# Altium PCB LCD.PcbDoc
Units mil, origin at the board's own origin, x right, y up, seen from the top; angles counter-clockwise.
Board outline 1710 x 3195 mil, 2 copper layers (Top Layer, Bottom Layer); 11 components, 24 nets, 62 pads, 11 vias.
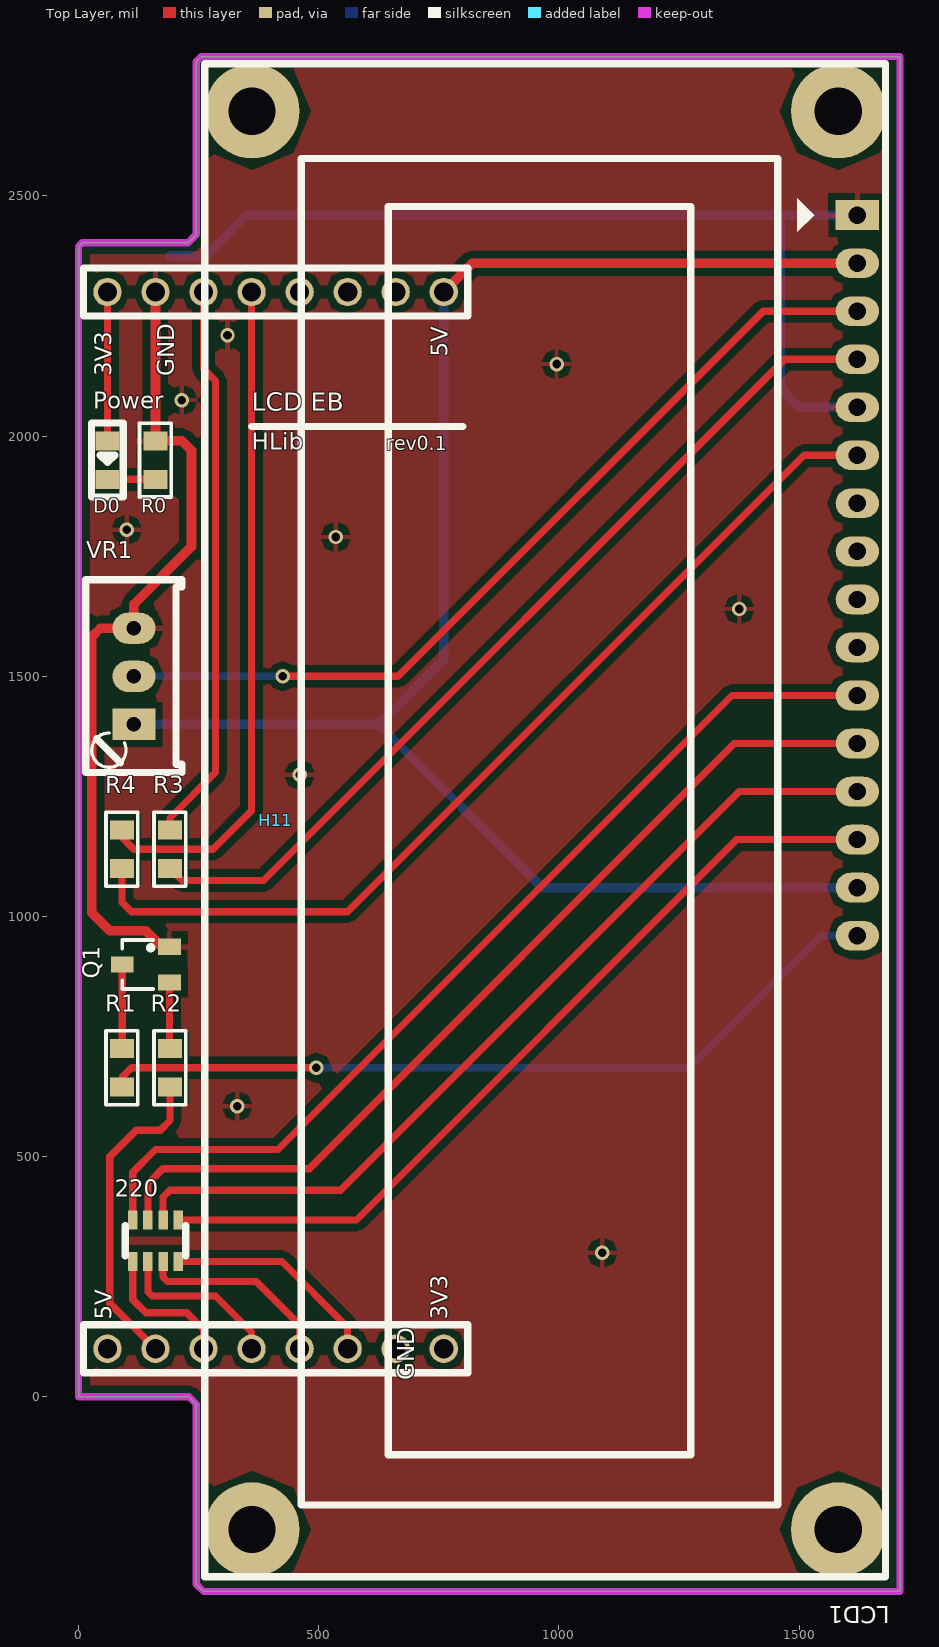
[diagram p0: Top Layer view]
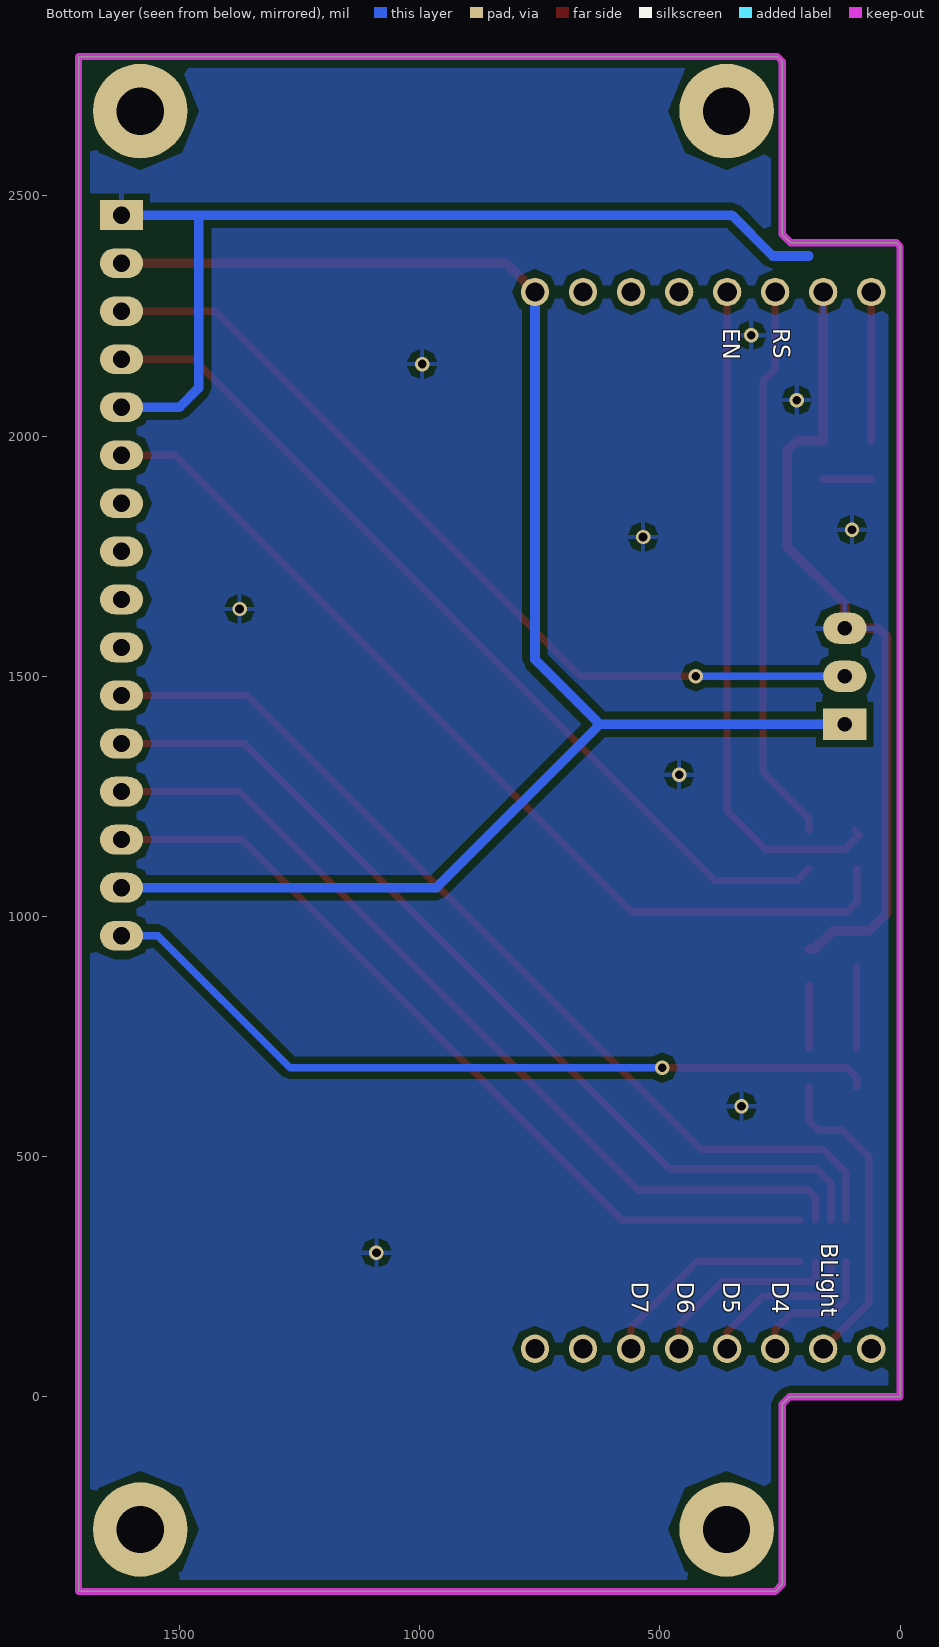
[diagram p1: Bottom Layer view, seen from below]
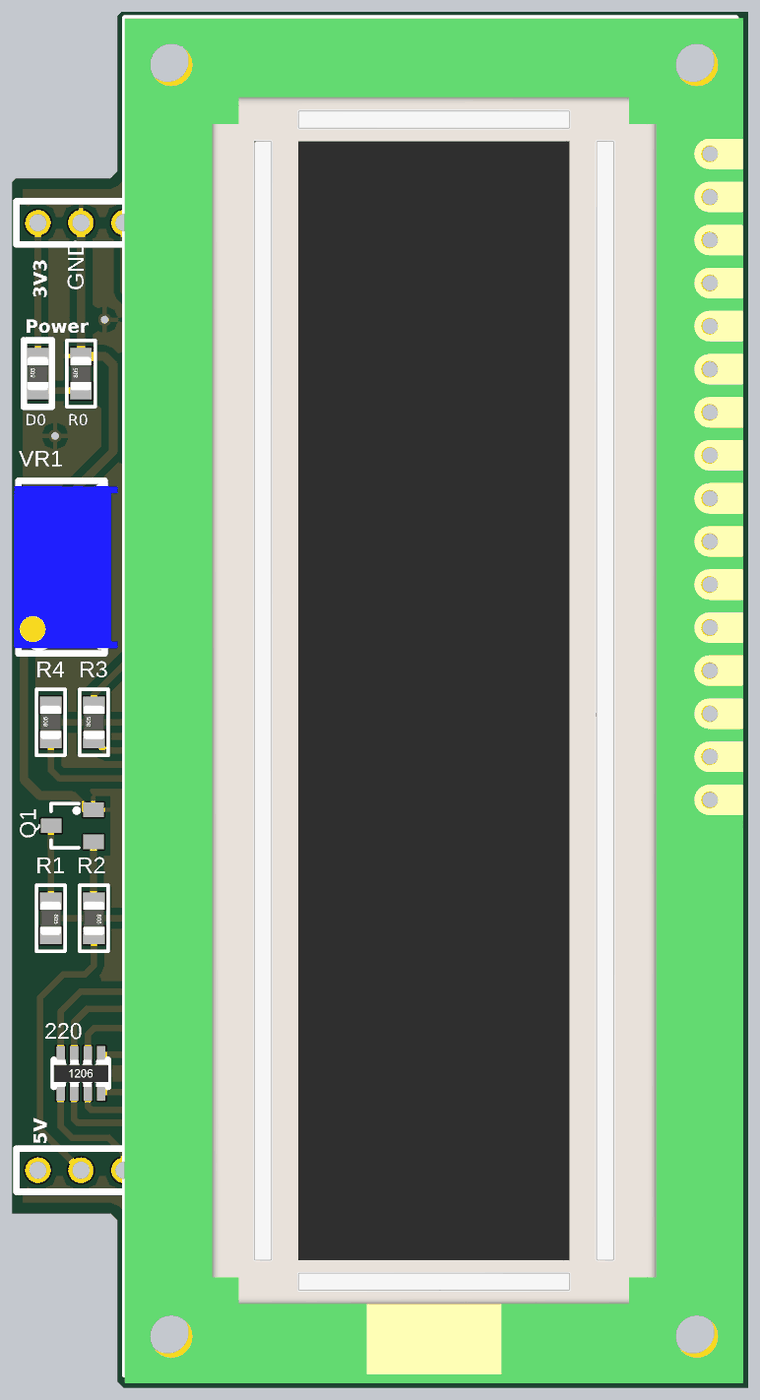
[diagram p2: 3D render of the assembled board from above, using the file's embedded part models]

## Layer stack, top to bottom
Top Layer: signal copper 1.4
Dielectric: dielectric 12.6, FR-4, Dk 4.8
Bottom Layer: signal copper 1.4

## Board outline
0,0 230,0 245,-15 245,-390 260,-405 1710,-405 1710,2790 255,2790 245,2780 245,2420 227.5,2402.5 7.5,2402.5 0,2395

## Design rules (kind name [scope] priority, off if disabled: settings)
Clearance [InPolygon] p1: gap=15
Clearance Clearance_1 [All] p2: gap=10
PolygonConnect [All] p1: connectstyle=Relief reliefconductorwidth=10 reliefentries=4 polygonreliefangle="90 Angle"
RoutingVias [All] p1: holewidth=25 width=40 viastyle="Through Hole" minholewidth=28 minwidth=50 maxholewidth=28 maxwidth=50
SilkscreenOverComponentPads SilkToSolderMaskClearance [IsPad] p1: minsilkscreentomaskgap=10
SolderMaskExpansion [All] p1: expansion=4
Width [All] p1: maxlimit=25 minlimit=8 preferedwidth=10
27 further rules are at their usual default settings.

## Components (designator, comment, footprint, x,y, rotation, side; value= is the part's Value field where it differs from the comment)
220 "RA4" RA4 160,325 r0 top
D0 "Power" SMD0805 60,1950 r270 top
H11 "MBoard1_BH_DualPorts" MBoard1_BH_DualPorts 60,2300 r0 top
LCD1 "LCD 16x2A" LCD16X2 1680,2775 r270 top
Q1 "C1815" SOT23B 140,900 r90 top
R0 "R" SMD0805R 160,1950 r270 top
R1 "220" SMD0805R 90,685 r90 top
R2 "4k7" SMD0805R 190,685 r90 top
R3 "220" SMD0805R 190,1140 r270 top
R4 "220" SMD0805R 90,1140 r270 top
VR1 "10K" VR1 115,1400 r90 top

## Footprints (in the part's own frame and the unit in brackets; to place one, negate y for a bottom-side part, rotate by r counter-clockwise, add the part's x,y. Pads: shape width x height; smd on the part's side, far side on the other; paste and mask are expansions set on the pad)
LCD16X2 [mm] "LCD dipslay 16x2, 16 pin"
  rect 1.575x2.286 hole 0.914: 1(8,-1.5)
  oval 1.575x2.286 hole 0.914: 2(10.54,-1.5) 3(13.08,-1.5) 4(15.62,-1.5) 5(18.16,-1.5) 6(20.7,-1.5) 7(23.24,-1.5) 8(25.78,-1.5) 9(28.32,-1.5) 10(30.86,-1.5) 11(33.4,-1.5) 12(35.94,-1.5) 13(38.48,-1.5) 14(41.02,-1.5) 15(43.56,-1.5) 16(46.1,-1.5)
  round 5 hole 2.5: "Hole 0"(2.5,-2.5) "Hole 0"(77.5,-2.5) "Hole 1"(2.5,-33.5) "Hole 1"(77.5,-33.5)
  silkscreen extent 0,-36 80,0, body extent 0,-36.03 80.5,0.47, height 20.52
MBoard1_BH_DualPorts [mm]
  round 1.5 hole 1.02: 1(0,0) 2(2.54,0) 3(5.08,0) 4(7.62,0) 5(10.16,0) 6(12.7,0) 7(15.24,0) 8(17.78,0) 9(17.78,-55.88) 10(15.24,-55.88) 11(12.7,-55.88) 12(10.16,-55.88) 13(7.62,-55.88) 14(5.08,-55.88) 15(2.54,-55.88) 16(0,-55.88)
  silkscreen extent -1.27,-57.15 19.05,1.27, body extent -1.27,-57.15 19.05,1.27, height 8
RA4 [mm] "Resistor Array (0603x4) form TME"
  rect 0.5x1 smd: 1(-1.2,-1.1) 2(-1.2,1.1) 3(-0.4,-1.1) 4(-0.4,1.1) 5(0.4,-1.1) 6(0.4,1.1) 7(1.2,-1.1) 8(1.2,1.1)
  silkscreen extent -1.6,-0.8 1.6,0.8, body extent -1.6,-0.8 1.6,0.8, height 0.5
SMD0805 [mil] "Chip Resistor; Body 2.0 x 1.3 mm (LxW typ)"
  rect 39.37x50 smd: 1(-40,0) 2(40,0)
  silkscreen extent -77,-33 77,33, body extent -39,-25 39,25, height 31
SMD0805R [mil] "Chip Resistor; Body 2.0 x 1.3 mm (LxW typ)"
  rect 39.37x50 smd: 1(-40,0) 2(40,0)
  silkscreen extent -77,-33 77,33, body extent -39,-25 39,25, height 31
SOT23B [mm] "SOT 23B"
  rect 0.85x1.2 smd: 1(0.94,-1.245) 2(0,1.25) 3(-0.95,-1.25)
  silkscreen extent -1.3,-0.38 1.3,1.25, body extent -1.3,-0.38 1.3,1.25, height 1.27
VR1 [mil] "Variable Resistor"
  rect 65x90 hole 30: 1(0,0)
  oval 65x90 hole 30: 2(100,0) 3(200,0)
  silkscreen extent -100,-100 301,100, body extent -88,-130 288,110, height 455

## Part data
D0: library part LEDSMD, "LED 3mm"
LCD1: library part LCD16x2A, "LCD dipslay 16 char, 2 line"
Q1: "NPN 600mW, ECB"
R0: "RES_08"
R1 R2 R3 R4: library part R, "Resistor 1/4W"
VR1: library part VR1, "Var Resistor"

## Via types
v1: diameter 30, hole 18, Top Layer to Bottom Layer, tented both sides, 11 vias

## Nets (pads, with @x,y where several pads share a name; then routed paths per layer and width w, separated by ;. In a path a pad name is that pad's centre, name@x,y a point inside that pad or via, vN(x,y) a via of type N, cw(c..) or ccw(c..) an arc to the next point about the centre after c; other vN are vias at no path point)
3V3: D0.1 H11.1 | length 310
  Top Layer w15: D0.1 H11.1
5V: H11.8 LCD1.2 LCD1.15 VR1.1 | length 3484.4
  Top Layer w20: H11.8 820.04,2360.04 LCD1.2
  Bottom Layer w20: VR1.1 625,1400 ; H11.8 760,1535 630,1405 630,1395 964.96,1060.04 LCD1.15
GND: H11.2 LCD1.1 LCD1.5 Q1.1 R0.1 VR1.3 | length 3679.2
  Top Layer w20: H11.2 R0.1 215,1990 235,1970 235,1770 115,1650 VR1.3 45,1600 27.5,1582.5 27.5,1007.5 65,970 140,970 178,932 Q1.1@189,932
  Bottom Layer w20: 190,2375 265,2375 350.04,2460.04 1460,2460.04 ; LCD1.5 1499.96,2060.04 1460,2100 1460,2460.04 ; LCD1.1 1460,2460.04
  other v1: 1090,300 330,605 460,1295 1375,1640 535,1790 100,1805 215,2075 995,2150 310,2210
Net220_1: 220.1 H11.14 | length 292.5
  Top Layer w15: 220.1 112.76,202.24 140,175 225,175 260,140 H11.14
Net220_2: 220.2 LCD1.11 | length 2018.7
  Top Layer w15: 220.2 112.76,467.76 160,515 415,515 1360.04,1460.04 LCD1.11
Net220_3: 220.3 H11.13 | length 348.5
  Top Layer w15: 220.3 144.25,218.5 152.76,210 285,210 360,135 H11.13
Net220_4: 220.4 LCD1.12 | length 1932
  Top Layer w15: 220.4 144.25,444.25 175,475 480,475 1365.04,1360.04 LCD1.12
Net220_5: 220.5 H11.12 | length 407.8
  Top Layer w15: 220.5 175.75,249.25 185,240 370,240 460,150 H11.12
Net220_6: 220.6 LCD1.13 | length 1842.4
  Top Layer w15: 220.6 175.75,415.75 190,430 545,430 1375.04,1260.04 LCD1.13
Net220_7: 220.7 H11.11 | length 454.4
  Top Layer w15: 220.7 423.31,281.69 560,145 H11.11
Net220_8: 220.8 LCD1.14 | length 1741.6
  Top Layer w15: 220.8 578.31,368.31 1370.04,1160.04 LCD1.14
NetD0_2: D0.2 R0.2 | length 100
  Top Layer w15: D0.2 R0.2
NetH11_3: H11.3 R3.1 | length 1169.7
  Top Layer w15: R3.1 190,1205 285,1300 285,2115 260,2140 H11.3
NetH11_4: H11.4 R4.1 | length 1414.7
  Top Layer w15: R4.1@95,1180 85,1170 115,1140 280,1140 360,1220 H11.4
NetH11_5: H11.5
NetH11_6: H11.6
NetH11_7: H11.7
NetH11_15: H11.15 R2.1 | length 665.4
  Top Layer w15: H11.15 65,195 65,500 120,555 170,555 190,575 R2.1
NetLCD1_3: LCD1.3 VR1.2 | length 1820.8
  Top Layer w15: v1(425,1500) 665,1500 1425.04,2260.04 LCD1.3
  Bottom Layer w15: VR1.2 v1(425,1500)
NetLCD1_4: LCD1.4 R3.2 | length 1890.7
  Top Layer w15: R3.2 215,1075 385,1075 1470.04,2160.04 LCD1.4
NetLCD1_6: LCD1.6 R4.2 | length 2002.7
  Top Layer w15: R4.2 90,1030 110,1010 560,1010 1510.04,1960.04 LCD1.6
NetLCD1_16: LCD1.16 R1.1 | length 1673.2
  Top Layer w15: R1.1 90,665 110,685 v1(495,685)
  Bottom Layer w15: v1(495,685) 1270,685 1545.04,960.04 LCD1.16
NetQ1_2: Q1.2 R1.2 | length 170
  Top Layer w15: R1.2@90.79,725 Q1.2@90.79,895
NetQ1_3: Q1.3 R2.2 | length 132.6
  Top Layer w15: R2.2@189.21,725 Q1.3@189.21,857.6
pads on no net: "LCD1.Hole 0" "LCD1.Hole 1" H11.9 H11.10 H11.16 LCD1.7 LCD1.8 LCD1.9 LCD1.10

## Polygon pours and split planes (outlines as drawn)
GND on Top Layer "Bottom Layer-No Net" (solid, remove dead copper, pour order 2): 0,0 0,2395 7.5,2402.5 227.5,2402.5 245,2420 245,2780 255,2790 1710,2790 1710,-405 260,-405 245,-390 245,-15 230,0
GND on Bottom Layer "Bottom Layer-No Net" (solid, remove dead copper, pour order 4): 0,0 0,2395 7.5,2402.5 227.5,2402.5 245,2420 245,2780 255,2790 1710,2790 1710,-405 260,-405 245,-390 245,-15 230,0

## Keep-outs
Keep-Out Layer:
  lines w15: 0,0 45,0 230,0 245,-15 245,-165 245,-390 260,-405 1710,-405 1710,2790 255,2790 245,2780 245,2610 245,2525 245,2420 227.5,2402.5 122.5,2402.5 37.5,2402.5 7.5,2402.5 0,2395 0,0

## Silkscreen, mask and mechanical layers (free items; w line width, h text height)
Top Overlay:
  lines w15: 360,2020 800,2020
  text "5V" at 780,2165 h60 r90
  text "3V3" at 80,2125 h60 r90
  text "GND" at 210,2125 h60 r90
  text "Power" at 30,2045 h60
  text "LCD EB" at 360,2040 h65
  text "HLib" at 360,1960 h60
  text "rev0.1" at 640,1960 h50
  text "5V" at 80,160 h60 r90
  text "3V3" at 780,160 h60 r90
  text "GND" at 710,35 h60 r90
Bottom Overlay:
  text "RS" at 275,2225 h60 r90
  text "EN" at 380,2225 h60 r90
  text "BLight" at 175,320 h60 r90
  text "D4" at 277.5,240 h60 r90
  text "D5" at 380,240 h60 r90
  text "D6" at 475,240 h60 r90
  text "D7" at 570,240 h60 r90
Drill Drawing:
  text ".LEGEND" at 5060,-1300 h60
  text "Drill Drawing." at 5060,-1400 h60

## Dimensions
0,0 to -10,2400 on Mechanical 1
0,0 to 1710,-405 on Mechanical 1